# EAGLE board 0243_imu_BMI160 (EAGLE 9.6.2)
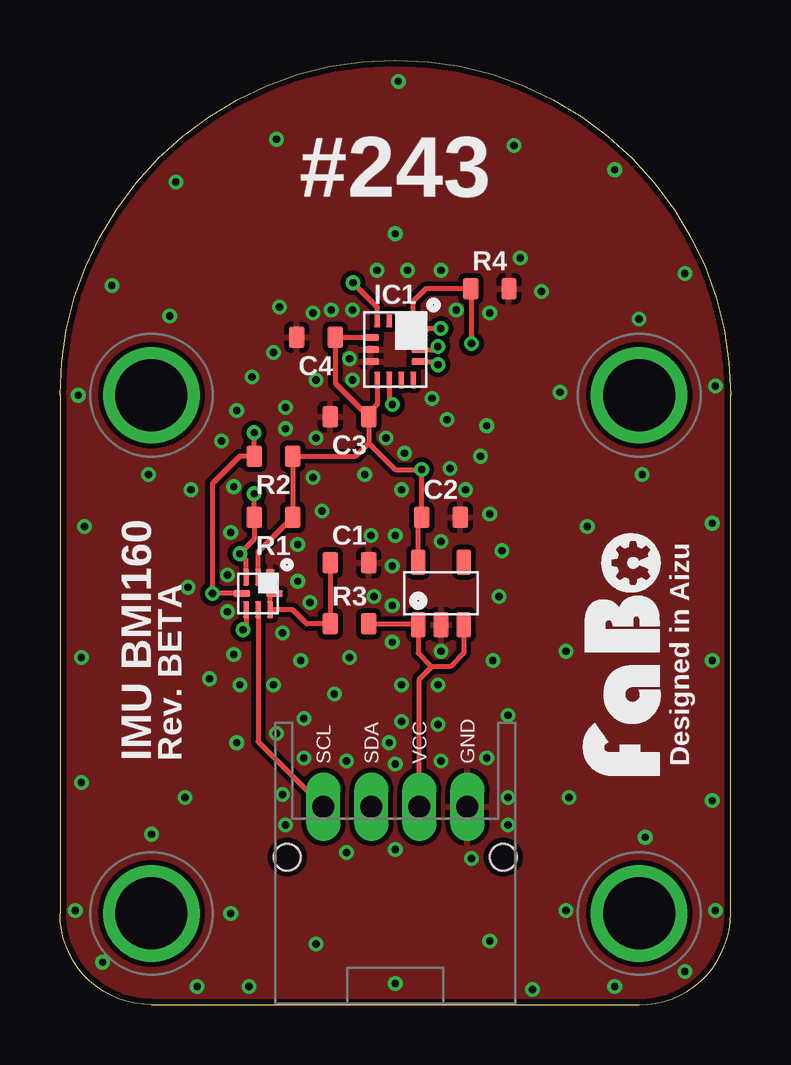
[diagram p0: board, top side]
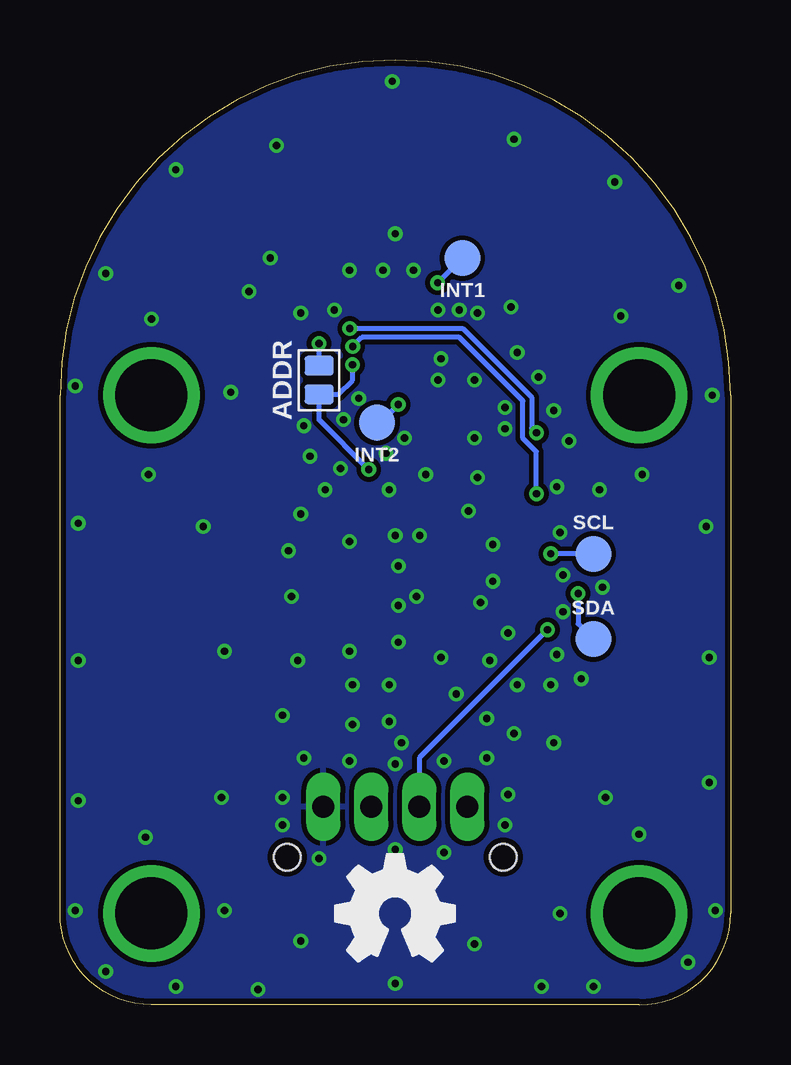
[diagram p1: board, bottom side, seen from below]

Size 27.94 x 39.37 mm. Coordinates in mm from the lower left corner, seen from the top.
Copper layers (1*16): Top 0.035mm / dielectric 1.6mm / Bottom 0.035mm
Design rules "PCBway": minimum track width 6mil, minimum drill 12mil, track to track 6mil, track to pad 6mil, pad to pad 6mil, via to via 6mil, smd to smd 6mil, copper to edge 10mil, drill to drill 10mil, minimum pad ring 10mil, minimum via ring 6mil, stop-mask expansion 2mil, vias tented up to drill 100mil, thermal gap 8mil

## Footprints (pad centres in the part's own frame; a part is rotated, then mirrored left to right if it is on the bottom)
EIA0603 = smd 0.65 x 0.9: 1 -0.8,0; 2 0.8,0
BMI160 = smd 0.675 x 0.25: 1 -1.262,0.75; 2 -1.262,0.25; 3 -1.262,-0.25; 4 -1.262,-0.75; 8 1.262,-0.75; 9 1.262,-0.25; 10 1.262,0.25; 11 1.262,0.75 | smd 0.25 x 0.675: 5 -0.5,-1.012; 6 0,-1.012; 7 0.5,-1.012; 12 0.5,1.012; 13 0,1.012; 14 -0.5,1.012
SOT-23-5 = smd 0.6 x 1.05: 1 -0.95,-1.3; 2 0,-1.3; 3 0.95,-1.3; 4 0.95,1.3; 5 -0.95,1.3
XQFN8 = smd 0.7 x 0.35: 1 -0.675,0.5 | smd 0.7 x 0.25: 2 -0.675,0; 3 -0.675,-0.5; 5 0.675,-0.5; 6 0.675,0; 7 0.675,0.5 | smd 0.25 x 0.7: 4 0,-0.675; 8 0,0.675
FABO_BRICK_I2C = drill 0.9 pad 1.422 long: GND 3,-10.795; SCL -3,-10.795; SDA -1,-10.795; VCC 1,-10.795 | drill 3 pad 3.81: P$1 -10.16,6.35; P$2 10.16,6.35; P$3 -10.16,-15.24; P$4 10.16,-15.24 | hole 1.1: -4.5,-12.895; 4.5,-12.895
JUMPER-SMD-2 = smd 0.8 x 1.2: 1 -0.6,0; 2 0.6,0
TP-15 = smd 1.5 x 1.5: 1 0,0

## Placement (x,y rotation side)
C1  0.1uF  [EIA0603]  12.06,18.41 180 top
C2  1uF  [EIA0603]  15.88,20.32 180 top
C3  0.1uF  [EIA0603]  12.06,24.51 0 top
C4  0.1uF  [EIA0603]  10.67,27.81 0 top
IC1  [BMI160]  13.97,27.3 270 top
IC2  [SOT-23-5]  15.88,17.14 0 top
IC3  [XQFN8]  8.26,17.14 270 top
J1  [FABO_BRICK_I2C]  13.97,19.05 0 top
JP1  [JUMPER-SMD-2]  17.14,26.04 90 bottom
LOGO1  [LOGO_FABO_M]  25.4,14.61 90 top
R1  4.7k  [EIA0603]  8.89,20.32 0 top
R2  4.7k  [EIA0603]  8.89,22.86 0 top
R3  200k  [EIA0603]  12.06,15.88 0 top
R4  10k  [EIA0603]  17.91,29.84 180 top
TP1  [TP-15]  5.71,15.24 0 bottom
TP2  [TP-15]  5.71,18.8 0 bottom
TP3  [TP-15]  11.18,31.11 0 bottom
TP4  [TP-15]  14.73,24.26 0 bottom
U$2  [LOGO_OSHW_M_BOTTOM]  13.97,3.81 0 top

## Library data of the parts
C1-C4 IC1 JP1 LOGO1 R1-R4 TP1-TP4 = component
IC2 = FaBo-Supply
IC3 = FaBo-LevelTranslator
J1 = FaBo-Template
U$2 = FaBo-etc

## Nets
3V3: C2.2 C3.2 C4.2 IC1.5 IC1.8 IC1.12 IC2.5 IC3.2 JP1.1 R1.2 R2.2
5V: IC2.1 IC2.3 J1.VCC R3.2
ADDRESS: IC1.1 JP1.2 R4.2
GND: C1.1 C2.1 C3.1 C4.1 IC1.6 IC1.7 IC2.2 IC3.1 J1.GND R4.1
INT1: IC1.4 TP3.1
INT2: IC1.9 TP4.1
PCAVREF: C1.2 IC3.7 IC3.8 R3.1
SCL: IC1.13 IC3.3 R1.1 TP2.1
SCL_HV: IC3.6 J1.SCL
SDA: IC1.14 IC3.4 R2.1 TP1.1
SDA_HV: IC3.5 J1.SDA

## Tracks (layer width: path | path; a pad name or v marks a point on that pad's centre or on a via)
3V3  (via drill 0.3)
  Top 0.203: IC3.2 8.26,18.89 R1.2 R2.2 12.32,22.86 12.87,23.41 | IC2.5 14.93,20.17 C2.2 v15.07,22.3 13.97,22.3 12.87,23.41 | IC1.5 C4.2 | C4.2 | 12.78,24.59 11.48,25.9 C4.2 | 12.78,24.59 C3.2 12.87,23.41 | IC1.8 13.22,25.03 12.78,24.59 | IC1.12 15.61,26.8 v15.75,26.67
  Bottom 0.203: v15.07,22.3 17.14,24.37 JP1.1 16.35,25.43 15.75,26.04 v15.75,26.67
5V
  Top 0.203: 15.49,14.1 14.93,14.67 IC2.1 14.89,15.88 R3.2 | IC2.3 16.82,14.67 16.26,14.1 15.49,14.1 | J1.VCC 14.97,13.57 15.49,14.1
ADDRESS  (via drill 0.3)
  Top 0.203: IC1.1 14.72,29.32 15.24,29.84 R4.2 17.14,29.81 v17.14,27.56
  Bottom 0.203: JP1.2 v17.14,27.56
GND  (via drill 0.3)
  other vias: 12.06,26.92 16.51,28.96 12.19,26.04 12.19,28.96 15.49,25.27 16.13,24.38 14.35,22.99 13.59,23.62 10.67,26.04 10.67,23.62 9.4,24.89 8,26.16 7.37,24.77 9.4,24 8.89,27.18 10.54,28.83 13.21,30.61 11.3,28.96 14.48,30.61 15.88,30.61 17.91,28.83 17.78,24.13 20.07,29.72 19.18,31.11 9.14,29.08 6.73,23.5 7.24,21.59 10.54,21.97 12.7,22.1 16.26,22.35 17.53,22.86 14.22,21.46 16.89,21.46 17.91,20.45 15.88,19.3 13.97,19.56 9.91,19.18 7.11,19.68 5.46,21.46 6.99,17.91 5.33,17.4 6.99,16.38 9.91,17.65 10.41,16.76 13.08,17.02 13.84,18.29 12.95,19.56 10.92,20.57 13.84,16.64 13.84,15.11 15.88,14.73 18.29,17.02 18.41,18.92 9.27,15.49 7.24,14.61 8.89,13.34 7.49,13.34 10.03,14.35 7.37,10.92 9.02,11.3 10.16,11.94 11.43,12.95 14.22,13.34 15.75,13.34 11.94,10.16 13.72,10.92 10.16,10.29 9.27,8.76 13.97,10.03 15.88,10.16 15.75,11.68 14.22,11.81 12.06,14.48 6.22,13.59 18.03,14.35 17.78,10.29 18.67,8.64 18.67,7.49 17.14,6.1 13.97,6.48 11.94,6.35 9.4,7.49 18.67,12.06 1.78,1.78 7.87,0.76 13.97,0.89 19.68,0.64 26.04,1.4 27.3,3.94 21.08,3.94 7.11,3.81 0.64,3.94 0.76,25.4 27.3,25.78 14.1,38.48 4.83,34.29 23.11,34.8 18.92,35.81 9.02,36.07 2.16,29.97 26.04,30.48 20.83,25.53 24.13,28.57 24.26,22.1 4.57,28.7 3.68,22.1 23.11,0.76 24.38,6.99 3.81,7.11 5.71,0.76 13.97,32.13 21.97,19.94 0.89,14.48 27.18,14.35 27.18,20.07 1.02,19.94 0.89,9.27 27.18,8.51 21.08,14.73 21.21,8.64 5.21,8.64 10.67,2.54 17.91,2.67
  pour Top (isolate 0.203): 0,0 0,39.37 27.94,39.37 27.94,0
  pour Bottom (isolate 0.203): 0,0 0,39.37 27.94,39.37 27.94,0
INT1  (via drill 0.3)
  Top 0.203: IC1.4 13.22,29.07 v12.2,30.09
  Bottom 0.203: TP3.1 v12.2,30.09
INT2  (via drill 0.3)
  Top 0.203: IC1.9 13.72,25.14 v13.85,25.02
  Bottom 0.203: TP4.1 14.61,24.26 v13.85,25.02
PCAVREF
  Top 0.203: IC3.8 8.76,17.14 IC3.7 9.69,16.47 10.29,15.88 R3.1 C1.2
SCL  (via drill 0.3)
  Top 0.203: IC1.13 15.62,27.3 v15.74,27.43 | v8.09,21.3 R1.1 8.09,19.39 v7.49,18.8 7.75,18.53 IC3.3
  Bottom 0.203: v15.74,27.43 15.36,27.81 11.3,27.81 8.65,25.16 8.65,23.61 8.09,23.05 v8.09,21.3 | TP2.1 v7.49,18.8
SCL_HV
  Top 0.203: IC3.6 8.26,10.97 J1.SCL
SDA  (via drill 0.3)
  Top 0.203: IC1.14 15.36,28.19 v15.87,28.19 | IC3.4 v6.35,17.14 6.35,21.72 7.49,22.86 R2.1 v8.09,23.84
  Bottom 0.203: v15.87,28.19 11.17,28.19 8.29,25.31 8.29,24.04 v8.09,23.84 | v6.35,17.14 6.35,15.88 TP1.1
SDA_HV  (via drill 0.3)
  Top 0.203: IC3.5 7.75,15.76 v7.63,15.63
  Bottom 0.203: v7.63,15.63 12.97,10.29 J1.SDA

## Text on the board
tPlace: #243 | Designed in Aizu | IMU BMI160 | Rev. BETA
bPlace: INT1 | ADDR | INT2 | SCL | SDA